# Altium PCB PCB 24V.PcbDoc
Units mm, origin at the board's own origin, x right, y up, seen from the top; angles counter-clockwise.
Board outline 46.48 x 61.98 mm, 2 copper layers (Top Layer, Bottom Layer); 8 components, 7 nets, 21 pads, 4 vias.
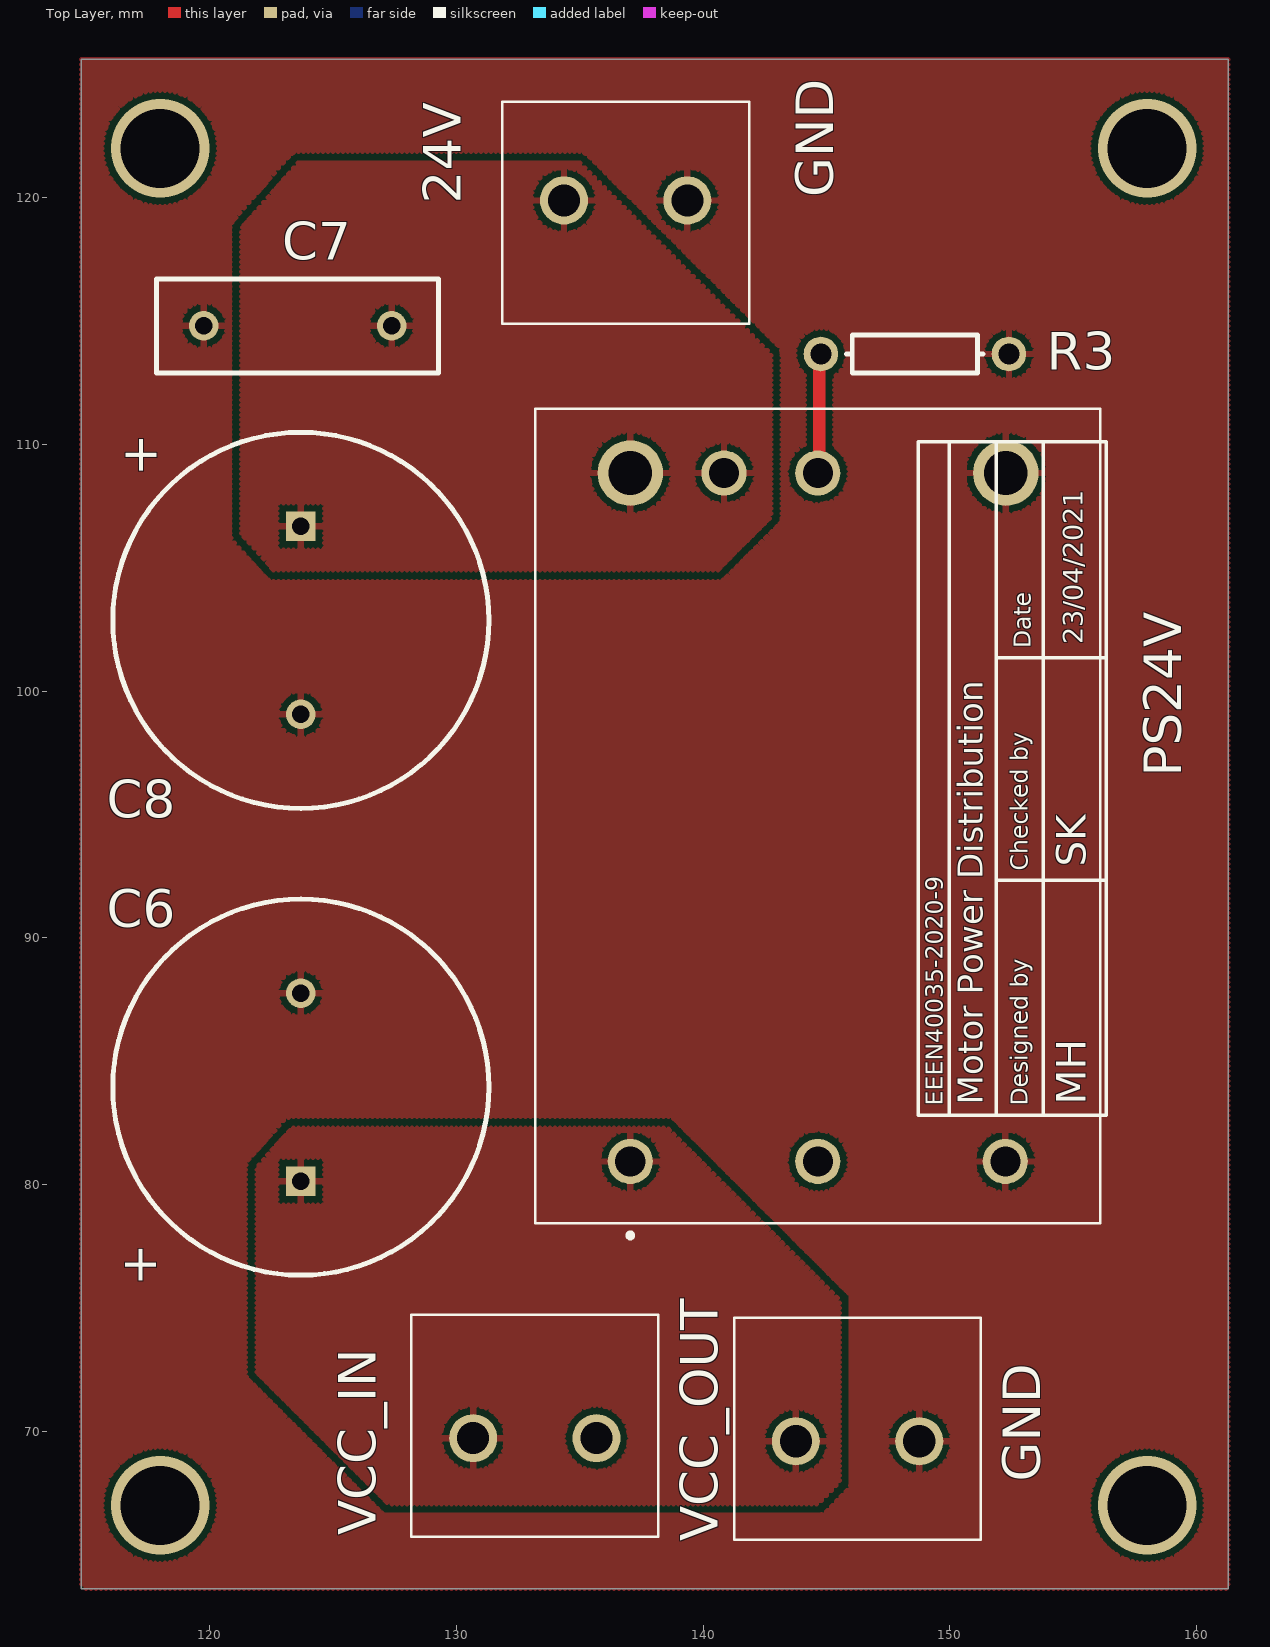
[diagram p0: Top Layer view]
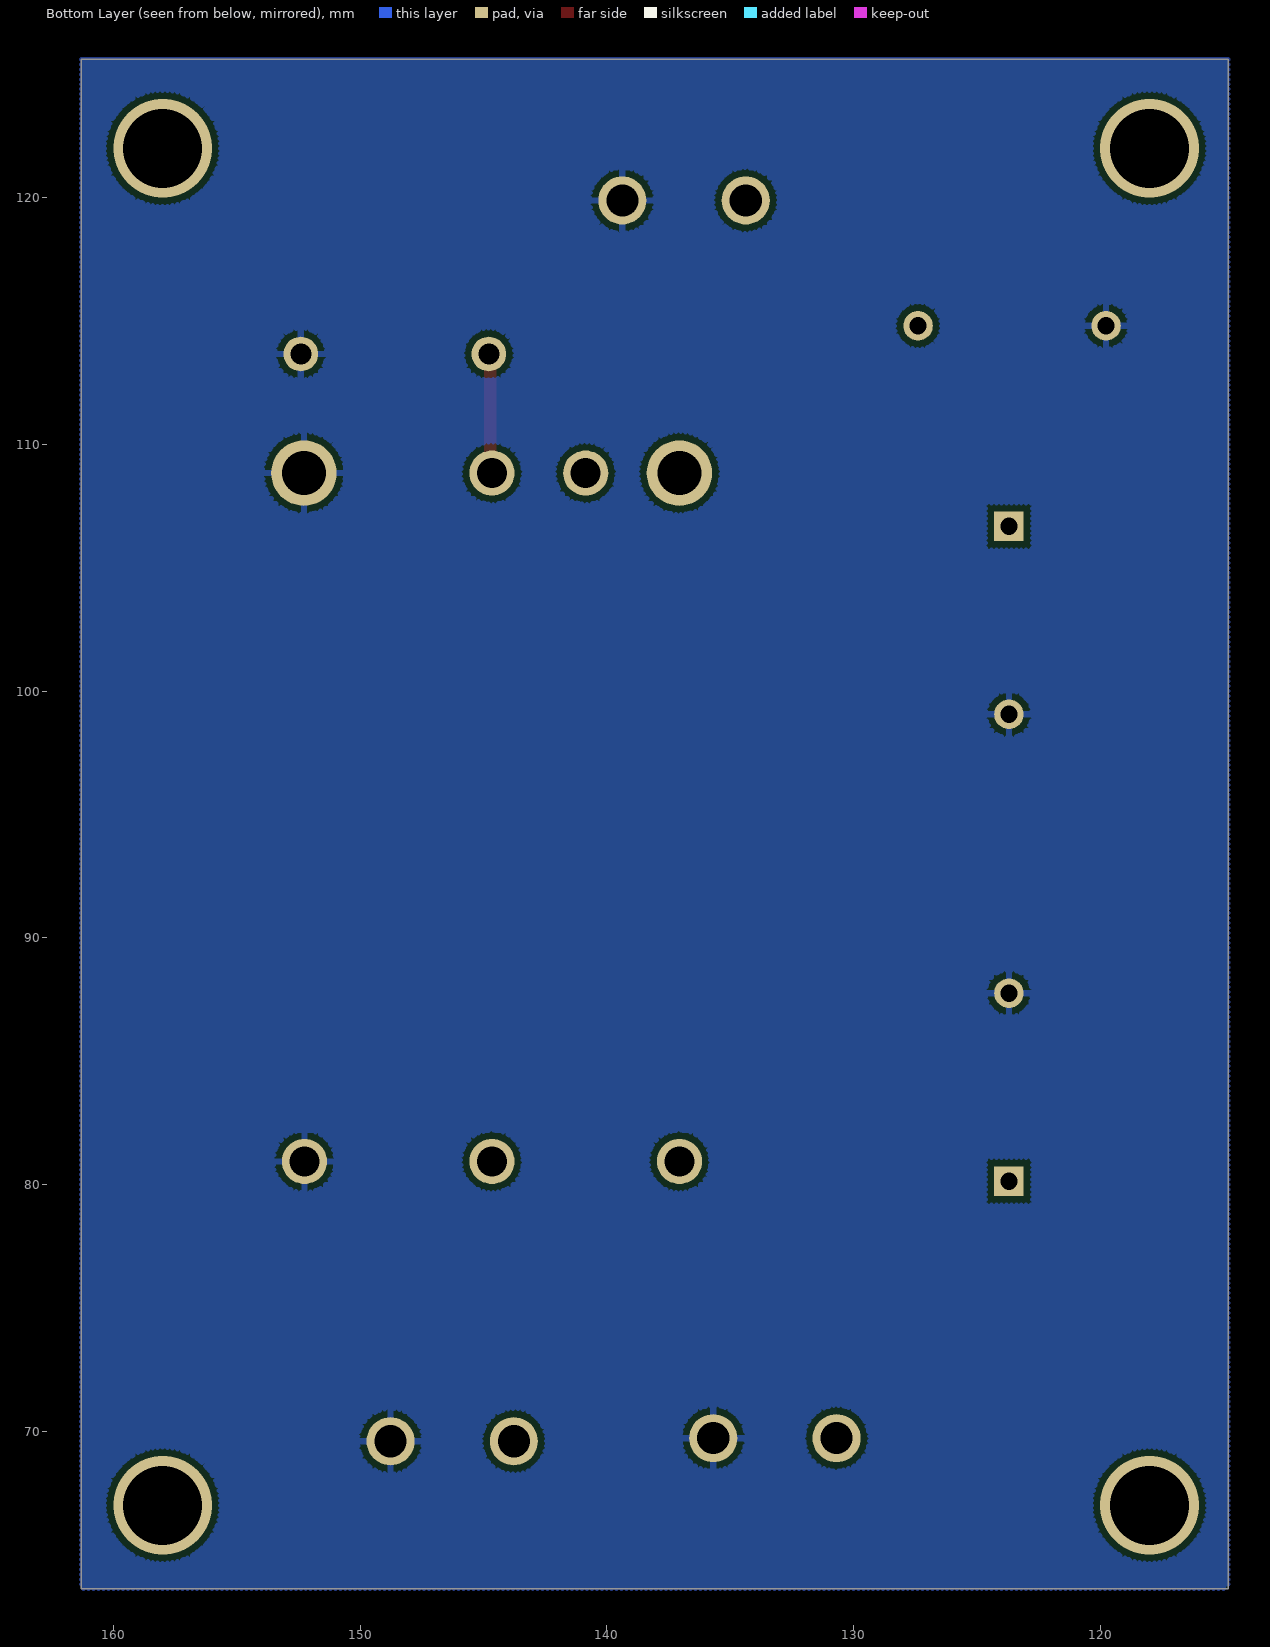
[diagram p1: Bottom Layer view, seen from below]
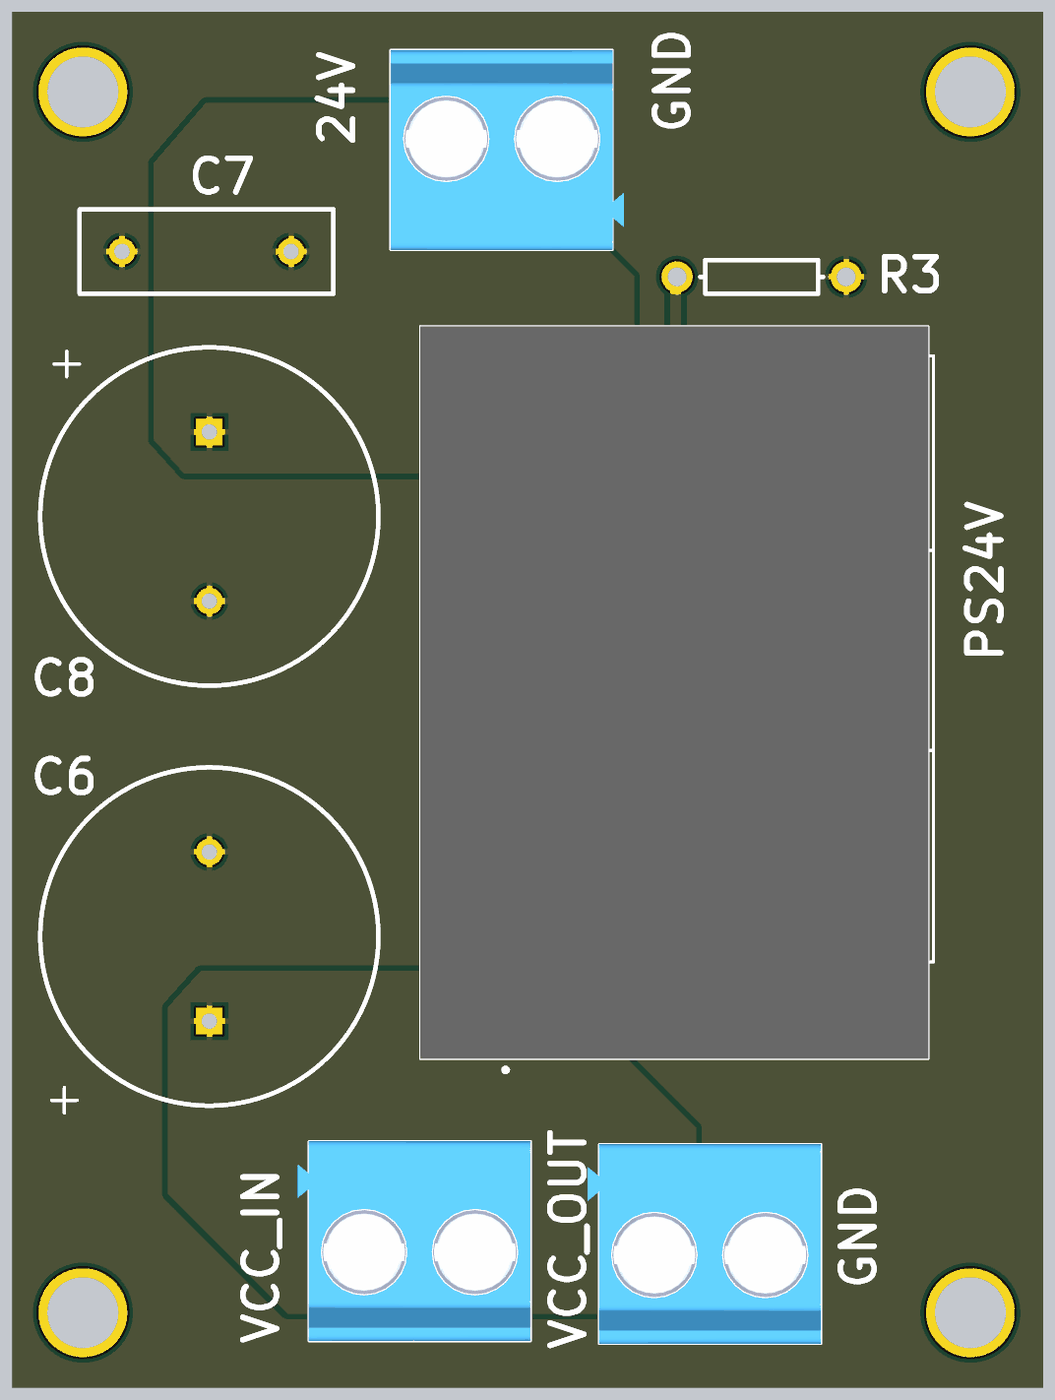
[diagram p2: 3D render of the assembled board from above, using the file's embedded part models]

## Layer stack, top to bottom
Top Solder: solder mask 0.0102, Solder Resist, Dk 3.5
Top Layer: signal copper 0.0356
Dielectric 1: dielectric 0.32, FR-4, Dk 4.8
Bottom Layer: signal copper 0.0356
Bottom Solder: solder mask 0.0102, Solder Resist, Dk 3.5

## Board outline
114.808,63.627 161.29,63.627 161.29,125.603 114.808,125.603

## Design rules (kind name [scope] priority, off if disabled: settings)
Clearance [All] p1: gap=0.254 ignorepadtopadclearanceinfootprint=FALSE except(0: Arc-Hole Track-Hole SMDPad-Hole THPad-Hole Via-Hole Fill-Hole Poly-Hole Region-Hole Text-Hole)
PolygonConnect [All] p1: connectstyle=Relief reliefconductorwidth=0.254 reliefentries=4 polygonreliefangle="90 Angle" airgapwidth=0.254
RoutingVias [All] p1: holewidth=0.711 width=1.27 viastyle="Through Hole" minholewidth=0.711 minwidth=1.27 maxholewidth=0.711 maxwidth=1.27
SolderMaskExpansion [All] p1: expansion=0.102 istentingtop=FALSE
Width [All] p1: maxlimit=4 minlimit=0.2 preferedwidth=0.5 minimp=50.000000 maximp=50.000000 favimp=50.000000
30 further rules are at their usual default settings.

## Classes and differential pairs
component class Regulators: VCC_IN VCC_OUT

## Components (designator, comment, footprint, x,y, rotation, side; value= is the part's Value field where it differs from the comment)
24V "TB001-500-02BE" TB00150002BE 139.366,119.888 r180 top
C6 "Cap Pol1" RB7.6-15 123.698,83.947 r270 top value=100uF
C7 "Cap" RAD-0.3 123.571,114.808 r0 top value=100pF
C8 "Cap Pol1" RB7.6-15 123.698,102.87 r90 top value=22uF
PS24V "I6A24014A033V-001-R" I6A24014A033V001R 137.053,80.939 r90 top
R3 "Rup" AXIAL-0.3 148.59,113.665 r180 top value=430
VCC_IN "TB001-500-02BE" TB00150002BE 130.683,69.723 r0 top
VCC_OUT "TB001-500-02BE" TB00150002BE 143.764,69.596 r0 top

## Footprints (in the part's own frame and the unit in brackets; to place one, negate y for a bottom-side part, rotate by r counter-clockwise, add the part's x,y. Pads: shape width x height; smd on the part's side, far side on the other; paste and mask are expansions set on the pad)
AXIAL-0.3 [mm] "Axial Device, Thru-Hole; 2 Leads; 0.3 in Pin Spacing"
  round 1.4 hole 0.85: 1(-3.81,0) 2(3.81,0)
  silkscreen extent -2.77,-0.76 2.77,0.76
I6A24014A033V001R [mm]
  round 1.83 hole 1.22: 1(0,0) 2(0,-7.6) 3(0,-15.2) 6(27.9,-7.6) 7(27.9,-3.8)
  round 2.655 hole 1.77: 4(27.9,-15.22) 8(27.9,0)
  silkscreen extent -3.1,-19.05 30.5,3.85, body extent -2.5,-19.05 30.5,3.85, height 12.2
RAD-0.3 [mm] "Radial Cap, Thru-Hole; 2 Leads; 0.3 in Pin Spacing"
  round 1.2 hole 0.7: 1(-3.81,0) 2(3.81,0)
  silkscreen extent -5.71,-1.91 5.71,1.91
RB7.6-15 [mm] "Polarized Capacitor (Radial); 2 Leads"
  rect 1.2x1.2 hole 0.7: 1(3.81,0)
  round 1.2 hole 0.7: 2(-3.81,0)
  silkscreen extent -7.62,-7.62 7.62,7.62
TB00150002BE [mm]
  round 1.95 hole 1.3: 1(0,0) 2(5,0)
  silkscreen extent -2.5,-4 7.5,5, body extent -3.01,-4 7.49,5, height 13.01

## Part data
24V VCC_IN VCC_OUT: "Integrated Circuit", Manufacturer_Name="CUI Inc.", Mouser2 Part Number=490-TB001-500-02BE, Datasheet Link=https://componentsearchengine.com//TB001-500-02BE.pdf, Height=12.9mm, Manufacturer_Part_Number=TB001-500-02BE, Mouser2 Price/Stock=https://www.mouser.com/Search/Refine.aspx?Keyword=490-TB001-500-02BE
C6 C8: "Polarized Capacitor (Radial)", LatestRevisionDate=17-Jul-2002, LatestRevisionNote="Re-released for DXP Platform.", PackageDescription="Polarized Capacitor (Radial); 2 Leads", PackageReference=RB7.6-15, Published=8-Jun-2000, Publisher="Altium Limited"
C7: "Capacitor", LatestRevisionDate=17-Jul-2002, LatestRevisionNote="Re-released for DXP Platform.", PackageDescription="Radial Cap, Thru-Hole; 2 Leads; 0.3 in Pin Spacing", PackageReference=RAD-0.3, Published=8-Jun-2000, Publisher="Altium Limited"
PS24V: "Power Supply", Manufacturer_Name=TDK, Mouser2 Part Number=967-I6A24014A033V001, Datasheet Link=https://componentsearchengine.com//I6A24014A033V-001-R.pdf, Height=12.1mm, Manufacturer_Part_Number=I6A24014A033V-001-R, Mouser2 Price/Stock=https://www.mouser.com/Search/Refine.aspx?Keyword=967-I6A24014A033V001
R3: library part Res1, "Resistor", LatestRevisionDate=17-Jul-2002, LatestRevisionNote="Re-released for DXP Platform.", PackageDescription="Axial Device, Thru-Hole; 2 Leads; 0.3 in Pin Spacing", PackageReference=AXIAL-0.3, Published=8-Jun-2000, Publisher="Altium Limited"

## Via types
v1: diameter 4, hole 3.2, Top Layer to Bottom Layer, 4 vias

## Nets (pads, with @x,y where several pads share a name; then routed paths per layer and width w, separated by ;. In a path a pad name is that pad's centre, name@x,y a point inside that pad or via, vN(x,y) a via of type N, cw(c..) or ccw(c..) an arc to the next point about the centre after c; other vN are vias at no path point)
GND: 24V.1 C6.2 C7.1 C8.2 PS24V.3 PS24V.4 R3.1 VCC_IN.2 VCC_OUT.2
NetPS5V_6: 
NetPS24V_6: PS24V.6 R3.2 | length 4.9
  Top Layer w0.254: PS24V.6 PS24V.6@144.716,108.902 ; R3.2@144.716,113.602 R3.2
  Top Layer w0.5: PS24V.6@144.716,108.902 R3.2@144.716,113.602
VCC: C6.1 PS24V.1 VCC_IN.1 VCC_OUT.1
VCC_5V: 
VCC_12V: 
VCC_24V: 24V.2 C7.2 C8.1 PS24V.7 PS24V.8
  other v1: 118,67 158,67 118,122 158,122
pads on no net: PS24V.2

## Polygon pours and split planes (outlines as drawn)
GND on Top Layer "GND_L01_P004" (hatched 90Degree grid 0 track 0.2, pour order 4): 114.808,125.603 161.29,125.603 161.29,63.627 114.808,63.627
VCC on Top Layer "VCC_L01_P003" (hatched 90Degree grid 0 track 0.2, pour order 3): 123.342,82.296 138.557,82.296 145.542,75.311 145.542,67.945 144.653,67.056 127.254,67.056 121.92,72.39 121.92,80.716
VCC_24V on Top Layer "VCC_24V_L01_P002" (hatched 90Degree grid 0 track 0.2, pour order 2): 122.606,104.902 140.589,104.902 142.748,107.061 142.748,113.665 135.001,121.412 123.588,121.412 121.285,118.755 121.285,106.37
GND on Bottom Layer "GND_L02_P006" (hatched 90Degree grid 0 track 0.2, pour order 6): 114.808,125.603 161.29,125.603 161.29,63.627 114.808,63.627

## Silkscreen, mask and mechanical layers (free items; w line width, h text height)
Top Overlay:
  lines w0.14: 149.987,82.804 149.987,110.109 ; 151.892,92.329 156.337,92.329 ; 151.892,101.346 156.337,101.346 ; 151.892,110.109 151.892,82.804 ; 153.797,82.804 153.797,110.109 ; 151.892,82.804 148.717,82.804 148.717,110.109 154.178,110.109 156.337,110.109 156.337,82.804 151.892,82.804
  text "GND" at 145.288,120.015 h1.52 r90
  text "23/04/2021" at 155.395,101.907 h0.8 r90
  text "Date" at 153.276,101.74 h0.7 r90
  text "SK" at 155.522,92.89 h1.2 r90
  text "Checked by" at 153.17,92.723 h0.7 r90
  text "Motor Power Distribution" at 151.331,83.238 h1 r90
  text "MH" at 155.522,83.238 h1.2 r90
  text "EEEN40035-2020-9" at 149.72,83.198 h0.7 r90
  text "Designed by" at 153.17,83.198 h0.7 r90
  text "GND" at 153.67,67.945 h1.52 r90

## Text inside footprints (layer, text, board x,y; h text height)
C6: Top Overlay "+" at 116.586,77.597 h1.5 r270
C8: Top Overlay "+" at 117.856,108.712 h1.5 r90